# Altium PCB PCB.PcbDoc
Units mm, origin at the board's own origin, x right, y up, seen from the top; angles counter-clockwise.
Board outline 60.25 x 32.5 mm, 2 copper layers (Top Layer, Bottom Layer), stack 1.521 mm thick; 44 components, 23 nets, 113 pads, 63 vias.
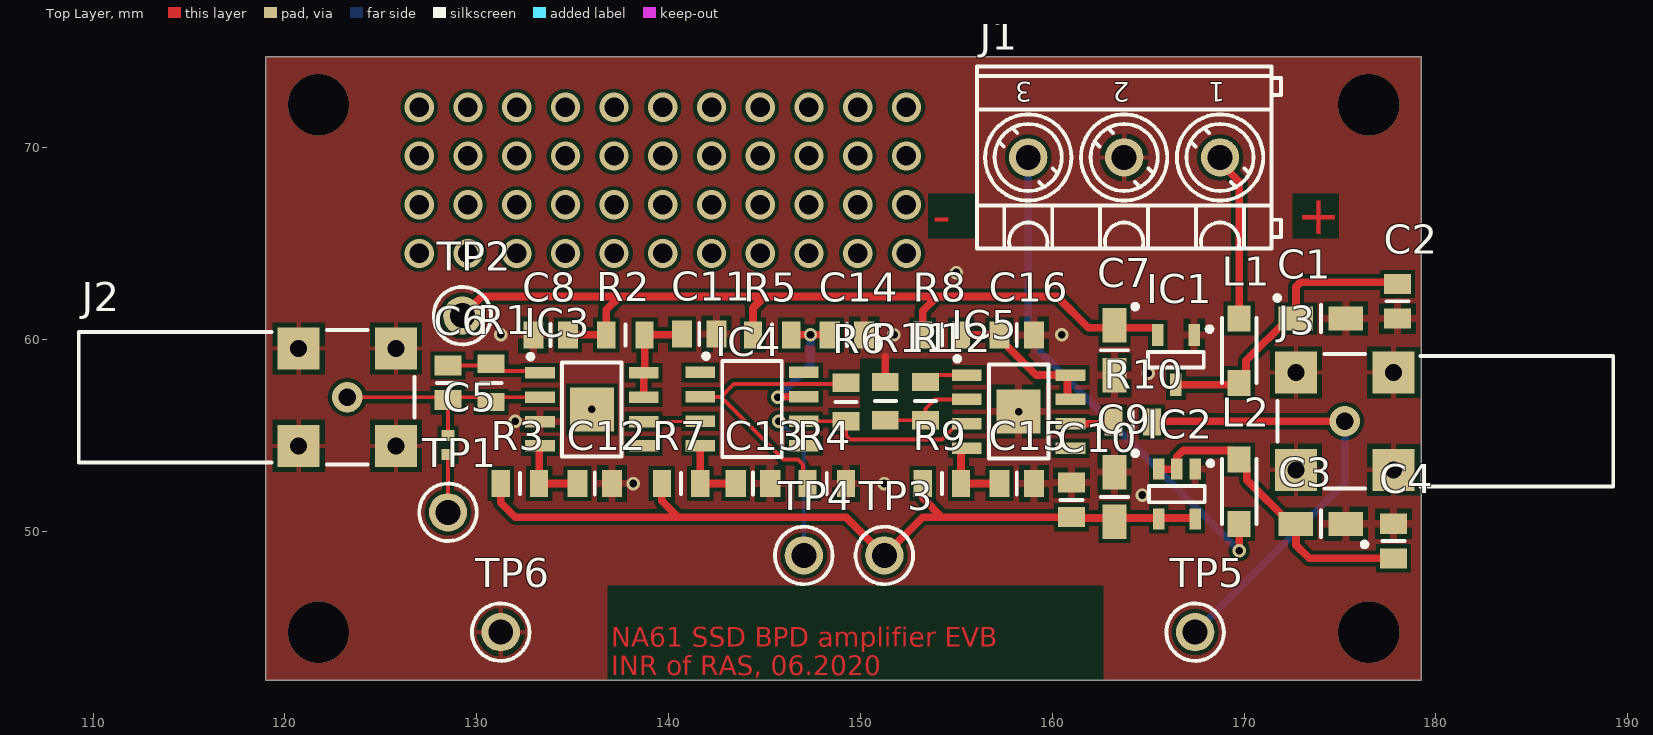
[diagram p0: Top Layer view]
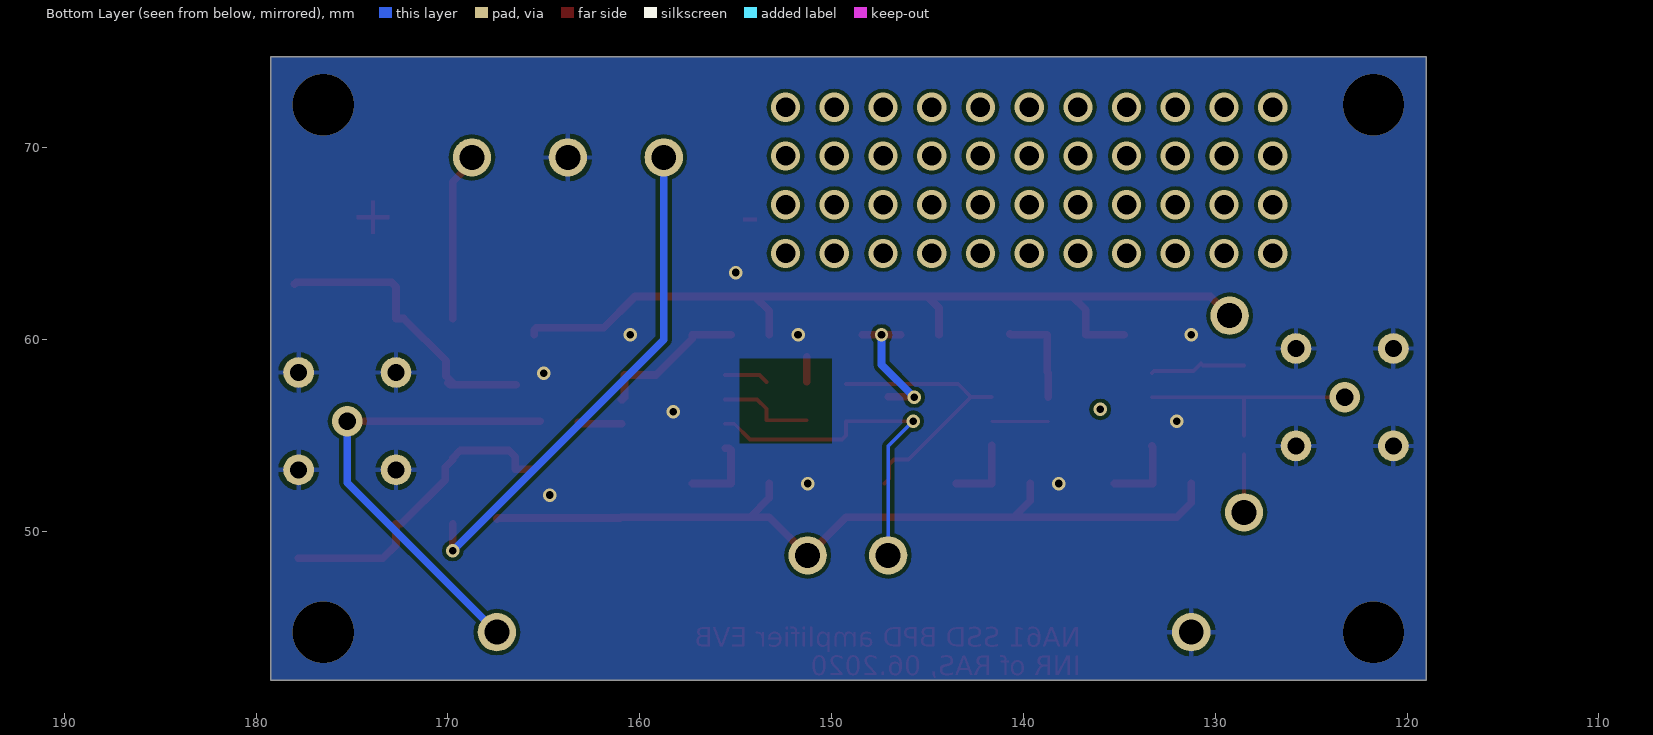
[diagram p1: Bottom Layer view, seen from below]
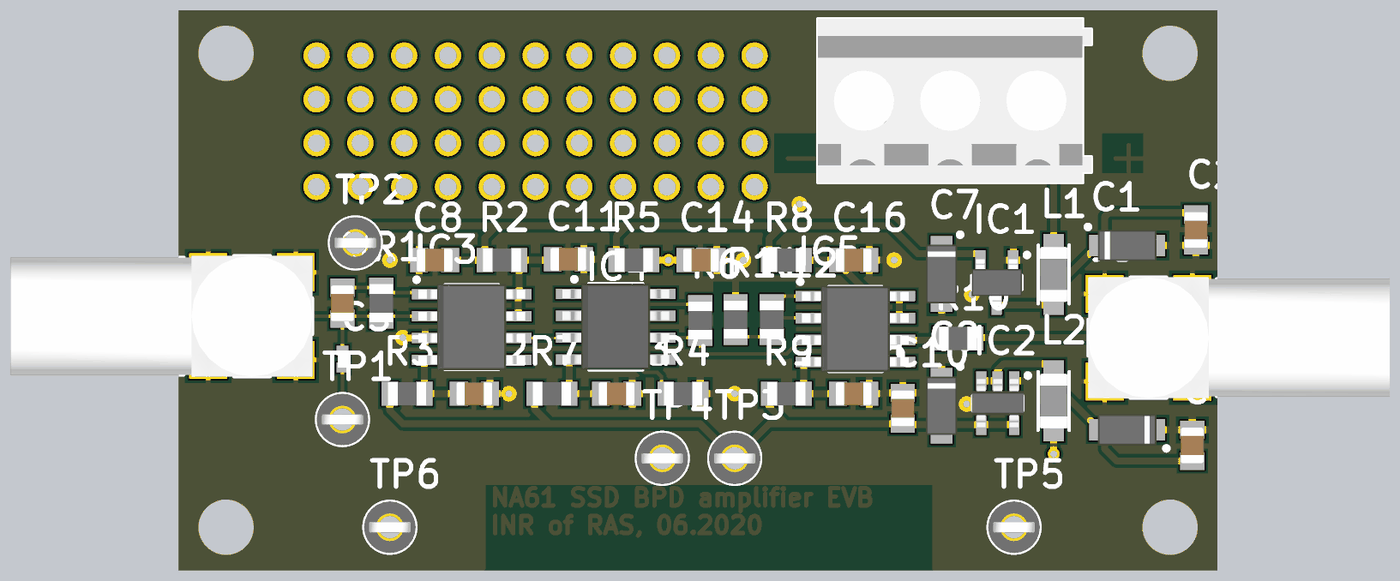
[diagram p2: 3D render of the assembled board from above, using the file's embedded part models]

## Layer stack, top to bottom
Top Solder: solder mask 0.0102, Solder Resist, Dk 3.5
Top Layer: signal copper 0.0356
Dielectric 1: dielectric 1.45, FR-4, Dk 4.8
Bottom Layer: signal copper 0.0356
Bottom Solder: solder mask 0.0102, Solder Resist, Dk 3.5

## Board outline
119,42.25 179.25,42.25 179.25,74.75 119,74.75

## Design rules (kind name [scope] priority, off if disabled: settings)
Clearance [All] p1: gap=0.2 ignorepadtopadclearanceinfootprint=FALSE
PolygonConnect [All] p1: thpad.connectstyle=Relief thpad.reliefconductorwidth=0.254 thpad.reliefentries=4 thpad.polygonreliefangle="90 Angle" thpad.airgapwidth=0.254 smdpad.connectstyle=Relief smdpad.reliefconductorwidth=0.4 smdpad.reliefentries=4 smdpad.polygonreliefangle="90 Angle" smdpad.airgapwidth=0.254 via.connectstyle=Direct via.reliefconductorwidth=0.254 via.reliefentries=4 via.polygonreliefangle="90 Angle" via.airgapwidth=0.254
RoomDefinition Amp [InComponentClass('Amp')] p1: confinementstyle=ConfineIn formatcopy=TRUE lockcomponents=FALSE outline 105.25,41.5 192.25,41.5 192.25,79 105.25,79
RoutingVias [All] p1: holewidth=0.4 width=0.7 viastyle="Through Hole" minholewidth=0.4 minwidth=0.7 maxholewidth=0.4 maxwidth=0.7
SolderMaskExpansion SolderMaskExpansion_Via [IsVia and not IsStitchingVia] p1: expansion=-1
SolderMaskExpansion [All] p2: expansion=0.102
Width [All] p1: maxlimit=0.4 minlimit=0.15 preferedwidth=0.2
30 further rules are at their usual default settings.

## Components (designator, comment, footprint, x,y, rotation, side; value= is the part's Value field where it differs from the comment)
C1 "22uF" CAPMP3216X180N 174.01,61.1 r0 top
C2 "100nF" CAPC2012X135N 178,62 r270 top
C3 "22uF" CAPMP3216X180N 174.01,50.4 r180 top
C4 "100nF" CAPC2012X135N 177.79,49.5 r90 top
C5 "0.5pF" CAPC1005X50N 128.5,54.51 r90 top
C6 "10pF" CAPC2012X135N 128.5,57.75 r90 top
C7 "1uF" CAPMP3216X180N 163.25,59.45 r270 top
C8 "100nF" CAPC2012X135N 133.85,60.25 r180 top
C9 "1uF" CAPMP3216X180N 163.25,51.8 r270 top
C10 "100nF" CAPC2012X135N 161,51.65 r90 top
C11 "100nF" CAPC2012X135N 141.6,60.3 r0 top
C12 "100nF" CAPC2012X135N 136.15,52.5 r0 top
C13 "100nF" CAPC2012X135N 144.4,52.5 r0 top
C14 "100nF" CAPC2012X135N 149.3,60.25 r0 top
C15 "100nF" CAPC2012X135N 158.15,52.5 r0 top
C16 "100nF" CAPC2012X135N 158.15,60.25 r0 top
IC1 "MCP1702T-5002E/CB" SOT95P255X145-3N 166.45,58.95 r270 top
IC2 "MAX1735EUK50+T" SOT95P280X145-5N 166.5,51.95 r270 top
IC3 "ADA4817-1 AD" SOIC127P600X175-9N-S229 136,56.365 r0 top
IC4 "AD8055ANZ ANALOG DEVICES" SOIC127P600X175-8N 144.35,56.385 r0 top
IC5 "AD8000YRDZ" SOIC127P600X175-9N-S229 158.25,56.25 r0 top
J1 "Terminal" WIELAND_25.161.0353.0 163.75,69.5 r180 top
J2 "LEMO 00" LEMO_EPK.00.250.NTN 123.25,57 r180 top
J3 "LEMO 00" LEMO_EPK.00.250.NTN 175.25,55.75 r0 top
L1 "50R@100MHz" IND_MURATA_BLM31PG 169.75,59.425 r270 top
L2 "50R@100MHz" IND_MURATA_BLM31PG 169.75,52.075 r90 top
R1 "5k1" RESC2012X60N 130.75,57.75 r90 top
R2 "3" RESC2012X60N 137.75,60.25 r0 top
R3 "3" RESC2012X60N 132.25,52.5 r0 top
R4 "5k1" RESC2012X60N 148.25,52.5 r180 top
R5 "3" RESC2012X60N 145.4,60.25 r0 top
R6 "43k" RESC2012X60N 149.25,56.75 r270 top
R7 "3" RESC2012X60N 140.65,52.5 r0 top
R8 "3" RESC2012X60N 154.25,60.25 r0 top
R9 "3" RESC2012X60N 154.25,52.5 r0 top
R10 "51" RESC2012X60N 164.2,55.7 r0 top
R11 "432" RESC2012X60N 151.3,56.8 r270 top
R12 "432" RESC2012X60N 153.4,56.8 r90 top
TP1 "Test Point" VERO_20-2136 128.5,51 r0 top
TP2 "Test Point" VERO_20-2136 129.25,61.25 r0 top
TP3 "Test Point" VERO_20-2136 151.25,48.75 r0 top
TP4 "Test Point" VERO_20-2136 147.05,48.75 r0 top
TP5 "Test Point" VERO_20-2136 167.45,44.75 r0 top
TP6 "Test Point" VERO_20-2136 131.25,44.75 r0 top

## Footprints (in the part's own frame and the unit in brackets; to place one, negate y for a bottom-side part, rotate by r counter-clockwise, add the part's x,y. Pads: shape width x height; smd on the part's side, far side on the other; paste and mask are expansions set on the pad)
CAPC1005X50N [mm] "Chip Capacitor, Body 1.0x0.55mm, IPC Medium Density"
  rect 0.57x0.68 smd: 1(-0.49,0) 2(0.49,0)
  body extent -0.5,-0.27 0.5,0.28, height 0.5
CAPC2012X135N [mm] "Chip Capacitor, Body 2.0x1.25mm, IPC Medium Density"
  rect 1.05x1.4 smd: 1(-0.9,0) 2(0.9,0)
  silkscreen extent 0,-0.58 0,0.58, body extent -1.05,-0.67 1.05,0.68, height 1.25
CAPMP3216X180N [mm] "Capacitor, Polarized, Molded  Body 3.2x1.6mm, IPC Medium Density"
  rect 1.8x1.25 smd: 1(-1.3,0) 2(1.3,0)
  silkscreen extent -2.4,-0.7 0,1.2, body extent -1.7,-0.9 1.7,0.9, height 1.6
IND_MURATA_BLM31PG [mm] "Chip Ferrite Bead, 3.20mm L X 1.60mm W, BLM31PG Series"
  rect 1.35x1.2 smd: 1(-1.675,0) 2(1.675,0)
  silkscreen extent -1.7,-0.9 1.7,0.9, body extent -1.6,-0.8 1.6,0.8, height 1.3
LEMO_EPK.00.250.NTN [mm] "50 Ohm size 00 Coaxial Elbow (90°) socket"
  round 1.6 hole 0.9: 1(0,0)
  rect 2.2x2.2 / inner round 1.6 / far side round 1.6 hole 0.9: 2(-2.54,2.54) 2(-2.54,-2.54) 2(2.54,2.54) 2(2.54,-2.54)
  silkscreen extent -3.5,-3.5 14,3.5, body extent -3.5,-3.5 14,3.5, height 7
RESC2012X60N [mm] "Chip Resistor, EIA 0805, Metric 2012, Body 2.0x1.2mm, IPC Medium Density"
  rect 0.95x1.4 smd: 1(-1,0) 2(1,0)
  silkscreen extent 0,-0.55 0,0.55, body extent -1.1,-0.67 1.1,0.68, height 0.6
SOIC127P600X175-8N [mm] "SOIC 8, Pitch 1.27mm - Body 4x5mm, IPC Medium Density"
  rect 1.55x0.6 smd: 1(-2.7,1.905) 2(-2.7,0.635) 3(-2.7,-0.635) 4(-2.7,-1.905) 5(2.7,-1.905) 6(2.7,-0.635) 7(2.7,0.635) 8(2.7,1.905)
  silkscreen extent -2.52,-2.5 1.55,2.88, body extent -3.1,-2.5 3.1,2.5, height 1.75
SOIC127P600X175-9N-S229 [mm] "SOIC 8, Pitch 1.27mm - Body 4x5mm, (w/thermal tab 2.29mm X 2.29mm), IPC Medium Density"
  rect 1.55x0.6 smd: 1(-2.7,1.905) 2(-2.7,0.635) 3(-2.7,-0.635) 4(-2.7,-1.905) 5(2.7,-1.905) 6(2.7,-0.635) 7(2.7,0.635) 8(2.7,1.905)
  rect 2.29x2.29 smd: 9(0,0)
  silkscreen extent -3.32,-2.45 1.55,2.87, body extent -3.1,-2.5 3.1,2.5, height 1.75
SOT95P255X145-3N [mm] "SOT, 0.95mm Pitch; 3 Pin, 1.50mm W X 2.90mm L X 1.45mm H Body, IPC Medium Density"
  rect 1.15x0.6 smd: 1(-1.3,0.95) 2(-1.3,-0.95) 3(1.3,0)
  silkscreen extent -1.72,-1.45 0.4,1.88, body extent -1.35,-1.45 1.35,1.45, height 1.45
SOT95P280X145-5N [mm] "SOT, 0.95mm pitch; 5 pin, 1.60mm W X 2.90mm L X 1.45mm H body, IPC Medium Density"
  rect 1.1x0.6 smd: 1(-1.3,0.95) 2(-1.3,0) 3(-1.3,-0.95) 4(1.3,-0.95) 5(1.3,0.95)
  silkscreen extent -1.72,-1.45 0.43,1.88, body extent -1.4,-1.5 1.4,1.5, height 1.45
VERO_20-2136 [mm] "Black Bead PCB Terminal Test Pin (1.32 mm hole)"
  round 2 hole 1.3: 1(0,0)
  silkscreen extent -1.5,-1.5 1.5,1.5, body extent -1.5,-1.5 1.5,1.5, height 5.4
WIELAND_25.161.0353.0 [mm] "Terminal Block, Pitch 5mm, 3 Positions, Screw Connection"
  round 2 hole 1.3: 1(-5,0) 2(0,0) 3(5,0)
  silkscreen extent -8.18,-4.75 7.68,4.75, body extent -8.17,-4.75 7.68,4.75, height 15

## Part data
C1 C3: library part CTE3216-18_22UF_10V_10%, "Polarised capacitor", Case=A, Manufacturer=GENERIC, Manufacturer1 ComponentHeight=1.8mm, Manufacturer1 Example=AVX, Manufacturer1 Part Number=TAJA226K010R, Tolerance=±10%, Voltage=10V, Author="CERN DEM JLC", Component Type=Standard, CreateDate=03.12.2007, HelpURL=\\cern.ch\dfs\Applications\Altium\Datasheets\CTE_AVX_TAJ.pdf, LatestRevisionDate=03.12.2007, Manufacturer Part Number=CTE3216-18_22UF_10V_10%, Mounted=Yes, Part Description="Solid Tantalum Chip Capacitor", Part Number=CTE3216-18_22UF_10V_10%, Pin Count=2, Sense=No, SMD=Yes, Socket=No, Status=Preferred
C2 C4 C8 C10 C11 C12 C13 C14 C15 C16: library part CC0805_100NF_50V_10%_X7R, "Non-polarised capacitor", Case=0805, Manufacturer=GENERIC, Manufacturer1 ComponentHeight=1mm, Manufacturer1 Example=TDK, Manufacturer1 Part Number=C2012X7R1H104K085AA, Tolerance=±10%, Voltage=50V, Author="CERN DEM JLC", Component Type=Standard, CreateDate=03.12.2007, HelpURL=\\cern.ch\dfs\Applications\Altium\Datasheets\CC0805_X7R_TDK_C.pdf, LatestRevisionDate=22.04.2015, Manufacturer Part Number=CC0805_100NF_50V_10%_X7R, Mounted=Yes, Part Description="SMD Multilayer Chip Ceramic Capacitor", Part Number=CC0805_100NF_50V_10%_X7R, Pin Count=2, Sense=No, SMD=Yes, Socket=No, Status=Preferred, TC=X7R
C5: library part CC0402_0.5PF_25V_0.05PF_AVX_04023J0R5ABSTR, "Non-polarised capacitor", Case=0402, Manufacturer=AVX, Manufacturer Part Number=04023J0R5ABSTR, Tolerance=±0.05pF, Voltage=25V, Author="CERN DEM JLC", ComponentHeight=0.5mm, Component Type=Standard, CreateDate=22.02.2017, HelpURL=\\cern.ch\dfs\Applications\Altium\Datasheets\CC0402_AVX_ACCU-P.pdf, LatestRevisionDate=22.02.2017, Mounted=Yes, Part Description="Thin-Film Chip Capacitors for RF Signal and Power Applications, Accu-P Series", Part Number=CC0402_0.5PF_25V_0.05PF_AVX_04023J0R5ABSTR, Pin Count=2, Sense=No, SMD=Yes, Socket=No, Status=None
C6: library part CC0805_10PF_50V_1%_NP0, "Non-polarised capacitor", Case=0805, Manufacturer=GENERIC, Manufacturer1 ComponentHeight=1.35mm, Manufacturer1 Example=PHYCOMP, Manufacturer1 Part Number=223886118109, Tolerance=±1%, Voltage=50V, Author="CERN DEM MR", Component Type=Standard, CreateDate=31.05.2016, HelpURL=\\cern.ch\dfs\Applications\Altium\Datasheets\CC0805_NP0_PHYCOMP.pdf, LatestRevisionDate=31.05.2016, Manufacturer Part Number=CC0805_10PF_50V_1%_NP0, Mounted=Yes, Part Description="SMD Multilayer Chip Ceramic Capacitor", Part Number=CC0805_10PF_50V_1%_NP0, Pin Count=2, Sense=No, SMD=Yes, Socket=No, Status=None, TC=C0G/NP0
C7 C9: library part CTE3216-18_1UF_16V_10%, "Polarised capacitor", Case=A, Manufacturer=GENERIC, Manufacturer1 ComponentHeight=1.8mm, Manufacturer1 Example=AVX, Manufacturer1 Part Number=TAJA105K016RNJ, Tolerance=±10%, Voltage=16V, Author="CERN DEM JLC", Component Type=Standard, CreateDate=03.09.2012, HelpURL=\\cern.ch\dfs\Applications\Altium\Datasheets\CTE_AVX_TAJ.pdf, LatestRevisionDate=03.09.2012, Manufacturer Part Number=CTE3216-18_1UF_16V_10%, Mounted=Yes, Part Description="Solid Tantalum Chip Capacitor", Part Number=CTE3216-18_1UF_16V_10%, Pin Count=2, Sense=No, SMD=Yes, Socket=No, Status=Preferred
IC1: "3-Terminal Regulator 1=GND 2=OUT 3=IN", Case=SOT23-3, Manufacturer="MICROCHIP TECHNOLOGY", Author="CERN DEM JLC", Bonding=No, ComponentHeight=1.45mm, Component Type=Standard, CreateDate=16.02.2017, Device=MCP1702T-5002E/CB, HelpURL=\\cern.ch\dfs\Applications\Altium\Datasheets\MCP1702T-5002E-CB.pdf, LatestRevisionDate=16.02.2017, Manufacturer Part Number=MCP1702T-5002E/CB, Mounted=Yes, PackageDescription="SOT, 0.95mm Pitch; 3 Pin, 1.50mm W X 2.90mm L X 1.45mm H Body, IPC Medium Density", Part Description="5V 250mA Low Quiescent Current LDO Positive Voltage Regulator", Part Number=MCP1702T-5002E/CB, Pin Count=3, PressFit=No, Sense=No, SMD=Yes, Socket=No
IC2: "200mA, Negative-Output, Low-Dropout Linear Regulator", Case=SOT23-5, Manufacturer=MAXIM, Author="CERN DEM JLC", Bonding=No, ComponentHeight=1.45mm, Component Type=Standard, CreateDate=17.02.2010, Device=MAX1735EUK50+T, HelpURL=\\cern.ch\dfs\Applications\Altium\Datasheets\MAX1735EUK50+T.pdf, LatestRevisionDate=17.02.2010, Manufacturer Part Number=MAX1735EUK50+T, Mounted=Yes, PackageDescription="SOT, 0.95mm pitch; 5 pin, 1.60mm W X 2.90mm L X 1.45mm H body, IPC Medium Density", Part Description="5V, 200mA, Negative-Output, Low-Dropout Linear Regulator", Part Number=MAX1735EUK50+T, Pin Count=5, PressFit=No, Sense=No, SMD=Yes, Socket=No
IC3: library part ADA4817-1, Manufacturer=AD, Name=ADA4817-1
IC4: library part AD8055ANZ, Case=DIP8-300, Manufacturer="ANALOG DEVICES", Author="CERN DEM JLC", Bonding=No, ComponentHeight=5.33mm, Component Type=Standard, CreateDate=14.03.2011, Device=AD8055ANZ, HelpURL=\\cern.ch\dfs\Applications\Altium\Datasheets\AD8055ANZ.pdf, LatestRevisionDate=14.03.2011, Manufacturer Part Number=AD8055ANZ, Mounted=Yes, PackageDescription="DIP 8 Leads, Row Spacing 7.62 mm; Pitch 2.54 mm", Part Description="Low Cost, 300 MHz Voltage Feedback Amplifier", Part Number=AD8055ANZ, Pin Count=7, PressFit=No, Sense=No, SMD=No, Socket=Yes
IC5: "1.5 GHz Ultrahigh Speed Operational Amplifier", Case=SOIC8, Manufacturer="ANALOG DEVICES", Author="CERN DEM JLC", Bonding=No, ComponentHeight=1.75mm, Component Type=Standard, CreateDate=14.05.2013, Device=AD8000YRDZ, HelpURL=\\cern.ch\dfs\Applications\Altium\Datasheets\AD8000YRDZ.pdf, LatestRevisionDate=14.05.2013, Manufacturer Part Number=AD8000YRDZ, Mounted=Yes, PackageDescription="SOIC 8, Pitch 1.27mm - Body 4x5mm, (w/thermal tab 2.29mm X 2.29mm), IPC Medium Density", Part Description="1.5 GHz Ultrahigh Speed Operational Amplifier", Part Number=AD8000YRDZ, Pin Count=9, PressFit=No, Sense=No, SMD=Yes, Socket=No
J1: library part WIELAND_25.161.0353.0, "Terminal Block, 3 Positions, Screw Connection", Manufacturer=WIELAND, Manufacturer Part Number=25.161.0353.0, Author="CERN DEM JLC", ComponentHeight=15mm, Component Type=Standard, CreateDate=02.06.2009, Family=Terminal, HelpURL=\\cern.ch\dfs\Applications\Altium\Datasheets\WIELAND_25.161.0353.0.pdf, LatestRevisionDate=02.06.2009, Mounted=Yes, Part Description="16A 250VAC 3 Way PCB Terminal Block, Pitch 5mm, Screw Connection, Wire Size Max: 2.5mm?", Part Number=WIELAND_25.161.0353.0, Pin Count=3, PressFit=No, Sense=No, SMD=No, Socket=No, Status=None
J2 J3: library part LEMO_EPK.00.250.NTN, Manufacturer=LEMO, Manufacturer Part Number=EPK.00.250.NTN, Author="CERN DEM JLC", ComponentHeight=7mm, Component Type=Standard, CreateDate=04.09.2012, Family="LEMO 00", HelpURL=\\cern.ch\dfs\Applications\Altium\Datasheets\LEMO_EPK.00.250.NTN.pdf, LatestRevisionDate=04.09.2012, Mounted=Yes, Part Description="Size 00, 50 Ohms Coaxial Elbow (90°) socket With Clearance Under The Body", Part Number=LEMO_EPK.00.250.NTN, Pin Count=2, PressFit=No, SCEM=09.46.11.180.6, Sense=No, SMD=No, Socket=No, Status=None
L1 L2: library part IND1206_MURATA_BLM31PG500SN1, "Inductor", Case=1206, Manufacturer=MURATA, Manufacturer Part Number=BLM31PG500SN1, Power=3.5A, Resistance=0.015R, Author="CERN DEM JLC", ComponentHeight=1.3mm, Component Type=Standard, CreateDate=05.12.2013, HelpURL=\\cern.ch\dfs\Applications\Altium\Datasheets\IND1206_MURATA_BLM31P.pdf, LatestRevisionDate=05.12.2013, Mounted=Yes, Part Description="SMD EMIFIL Chip Ferrite Bead", Part Number=IND1206_MURATA_BLM31PG500SN1, Pin Count=2, Sense=No, SMD=Yes, Socket=No, Status=None
R1 R4: library part R0805_5K1_1%_0.125W_100PPM, "Resistor - 1%", Case=0805, Manufacturer=GENERIC, Manufacturer1 ComponentHeight=0.6mm, Manufacturer1 Example="NIC COMPONENT", Manufacturer1 Part Number=NRC10F5101TRF, Power=0.125W, Tolerance=±1%, Author="CERN DEM JLC", Component Type=Standard, CreateDate=03.12.2007, HelpURL=\\cern.ch\dfs\Applications\Altium\Datasheets\R0805_NIC_NRC.pdf, LatestRevisionDate=13.03.2008, Manufacturer Part Number=R0805_5K1_1%_0.125W_100PPM, Mounted=Yes, Part Description="General Purpose Thick Film Chip Resistor", Part Number=R0805_5K1_1%_0.125W_100PPM, Pin Count=2, PressFit=No, Sense=No, SMD=Yes, Socket=No, Status=Preferred, TC=±100ppm/°C
R2 R3 R5 R7 R8 R9: library part R0805_3R_1%_0.125W_200PPM, "Resistor - 1%", Case=0805, Manufacturer=GENERIC, Manufacturer1 ComponentHeight=0.65mm, Manufacturer1 Example="YAGEO PHYCOMP", Manufacturer1 Part Number="232273463008L or RC0805FR-073RL", Power=0.125W, Tolerance=±1%, Author="CERN DEM JLC", Component Type=Standard, CreateDate=03.12.2007, HelpURL=\\cern.ch\dfs\Applications\Altium\Datasheets\R0805_Phycomp_RC0805.pdf, LatestRevisionDate=17.10.2012, Manufacturer Part Number=R0805_3R_1%_0.125W_200PPM, Mounted=Yes, Part Description="General Purpose Thick Film Chip Resistor", Part Number=R0805_3R_1%_0.125W_200PPM, Pin Count=2, PressFit=No, Sense=No, SMD=Yes, Socket=No, Status=Preferred, TC=±200ppm/°C
R6: library part R0805_43K_1%_0.125W_100PPM, "Resistor - 1%", Case=0805, Manufacturer=GENERIC, Manufacturer1 ComponentHeight=0.6mm, Manufacturer1 Example="NIC COMPONENT", Manufacturer1 Part Number=NRC10F4302TRF, Power=0.125W, Tolerance=±1%, Author="CERN DEM JLC", Component Type=Standard, CreateDate=03.12.2007, HelpURL=\\cern.ch\dfs\Applications\Altium\Datasheets\R0805_NIC_NRC.pdf, LatestRevisionDate=13.03.2008, Manufacturer Part Number=R0805_43K_1%_0.125W_100PPM, Mounted=Yes, Part Description="General Purpose Thick Film Chip Resistor", Part Number=R0805_43K_1%_0.125W_100PPM, Pin Count=2, PressFit=No, Sense=No, SMD=Yes, Socket=No, Status=Preferred, TC=±100ppm/°C
R10: library part R0805_51R_1%_0.125W_100PPM, "Resistor - 1%", Case=0805, Manufacturer=GENERIC, Manufacturer1 ComponentHeight=0.6mm, Manufacturer1 Example="NIC COMPONENT", Manufacturer1 Part Number=NRC10F51R0TRF, Power=0.125W, Tolerance=±1%, Author="CERN DEM JLC", Component Type=Standard, CreateDate=03.12.2007, HelpURL=\\cern.ch\dfs\Applications\Altium\Datasheets\R0805_NIC_NRC.pdf, LatestRevisionDate=13.03.2008, Manufacturer Part Number=R0805_51R_1%_0.125W_100PPM, Mounted=Yes, Part Description="General Purpose Thick Film Chip Resistor", Part Number=R0805_51R_1%_0.125W_100PPM, Pin Count=2, PressFit=No, Sense=No, SMD=Yes, Socket=No, Status=Preferred, TC=±100ppm/°C
R11 R12: library part R0805_432R_0.1%_0.1W_10PPM, "Resistor - 0.1%", Case=0805, Manufacturer=GENERIC, Manufacturer1 ComponentHeight=0.6mm, Manufacturer1 Example="TYCO HOLSWORTHY", Manufacturer1 Part Number=RN73C2A432RBTG, Power=0.1W, Tolerance=±0.1%, Author="CERN DEM JLC", Component Type=Standard, CreateDate=03.12.2007, HelpURL=\\cern.ch\dfs\Applications\Altium\Datasheets\R0805_Tyco_RN73.pdf, LatestRevisionDate=13.03.2008, Manufacturer Part Number=R0805_432R_0.1%_0.1W_10PPM, Mounted=Yes, Part Description="Thin Film Chip Resistor", Part Number=R0805_432R_0.1%_0.1W_10PPM, Pin Count=2, PressFit=No, Sense=No, SMD=Yes, Socket=No, Status="Not Recommended", TC=±10ppm
TP1 TP2 TP3 TP4 TP5 TP6: library part VERO_20-2136, Manufacturer="VERO TECHNOLOGIES", Manufacturer Part Number=20-2136, Author="CERN DEM JLC", ComponentHeight=5.3mm, Component Type=Standard, CreateDate=21.07.2008, Family="Test Point", HelpURL=\\cern.ch\dfs\Applications\Altium\Datasheets\VERO_20-2136.pdf, LatestRevisionDate=15.07.2013, Mounted=Yes, Part Description="Black Bead PCB Terminal Test Pin for 1.6mm PCB Thickness (1.32mm Hole)", Part Number=VERO_20-2136, Pin Count=1, PressFit=No, Sense=No, SMD=No, Socket=No, Status=None

## Via types
v1: diameter 1.524, hole 1.016, Top Layer to Bottom Layer, 44 vias
v2: diameter 0.7, hole 0.4, Top Layer to Bottom Layer, 15 vias
v3: diameter 3.2, hole 3.2, Top Layer to Bottom Layer, 4 vias

## Nets (pads, with @x,y where several pads share a name; then routed paths per layer and width w, separated by ;. In a path a pad name is that pad's centre, name@x,y a point inside that pad or via, vN(x,y) a via of type N, cw(c..) or ccw(c..) an arc to the next point about the centre after c; other vN are vias at no path point)
GND: C1.2 C2.2 C3.1 C4.2 C7.2 C8.2 C9.1 C10.2 C11.2 C12.2 C13.2 C14.2 C15.2 C16.2 IC1.1 IC2.1 IC3.3 IC5.9 J1.2 J2.2 J3.2 R4.1 R11.1 TP6.1 | length 1.3
  Top Layer w0.4: R11.1 151.3,59.1
  other v2: 164.7,51.9 138.15,52.5 151.25,52.5 132,55.75 158.25,56.25 165,58.25 131.25,60.25 151.75,60.25 160.5,60.25 155,63.5
  other v3: 121.75,44.75 176.5,44.75 121.75,72.25 176.5,72.25
NetC1_1: C1.1 C2.1 IC1.3 L1.2 | length 15.5
  Top Layer w0.4: IC1.3 169.9,57.65 L1.2@170,57.75 ; L1.2 170.1,58.1 170.1,58.9 172.3,61.1 C1.1 172.71,62.766 172.944,63 177.9,63 C2.1
NetC3_2: C3.2 C4.1 IC2.2 IC2.3 L2.2 | length 16.4
  Top Layer w0.4: IC2.3 IC2.2 166.5,53.9 166.825,54.225 169.35,54.225 169.75,53.825 L2.2 170.15,53.35 170.15,52.685 172.435,50.4 C3.2 172.71,49.29 173.4,48.6 C4.1
NetC5_1: C5.1 TP1.1 | length 3
  Top Layer w0.2: TP1.1 C5.1
NetC5_2: C5.2 C6.1 IC3.2 J2.1 R1.1 | length 11.9
  Top Layer w0.2: J2.1 IC3.2 ; C5.2 C6.1
NetC6_2: C6.2 IC3.1 R1.2 | length 5
  Top Layer w0.2: C6.2 130.65,58.65 R1.2 131.125,58.375 133.195,58.375 IC3.1
NetC7_1: C7.1 C8.1 IC1.2 R2.1 R5.1 R8.1 TP2.1 | length 46.5
  Top Layer w0.4: TP2.1 130.25,62.25 137.45,62.25 ; C8.1 R2.1 136.75,61.55 137.45,62.25 ; R5.1 144.4,61.65 145,62.25 ; R8.1 153.25,61.5 154,62.25 ; IC1.2 165.5,60.525 165.4,60.625 161.875,60.625 160.25,62.25 154,62.25 ; 137.45,62.25 145,62.25 ; 145,62.25 154,62.25
NetC9_2: C9.2 C10.1 IC2.4 IC2.5 R3.1 R7.1 R9.1 TP3.1 | length 42.6
  Top Layer w0.4: R3.1 131.25,51.5 132,50.75 140.5,50.75 ; R7.1 139.65,51.6 140.5,50.75 ; TP3.1@150.625,49.375 149.25,50.75 140.5,50.75 ; TP3.1 153.25,50.75 154.25,50.75 ; R9.1 153.25,51.75 154.25,50.75 ; IC2.5 167.4,50.7 163.25,50.7 161.05,50.7 C10.1 154.25,50.75
NetC11_1: C11.1 IC3.7 IC3.8 R2.2 | length 5.2
  Top Layer w0.4: IC3.7 IC3.8 138.75,58.32 R2.2 140.65,60.25 C11.1
NetC12_1: C12.1 IC3.4 R3.2 | length 4
  Top Layer w0.4: IC3.4 133.25,54.41 R3.2 C12.1
NetC13_1: C13.1 IC4.4 R7.2 | length 3.8
  Top Layer w0.4: IC4.4 R7.2 C13.1
NetC14_1: C14.1 IC4.7 R5.2 | length 7.3
  Top Layer w0.4: v2(145.7,57) 145.72,57.02 IC4.7 ; R5.2 v2(147.4,60.25) C14.1
  Bottom Layer w0.4: v2(145.7,57) 147.4,58.7 v2(147.4,60.25)
NetC15_1: C15.1 IC5.4 R9.2 | length 4.1
  Top Layer w0.4: IC5.4 155.35,54.345 155.25,54.245 R9.2 C15.1
NetC16_1: C16.1 IC5.7 IC5.8 R8.2 | length 7.9
  Top Layer w0.4: R8.2 C16.1 157.25,60.075 159.17,58.155 160.8,58.155 160.8,56.985 160.9,56.885 IC5.7
NetIC3_6: IC3.6 IC4.3 | length 3
  Top Layer w0.15: IC3.6 141.63,55.73 IC4.3
NetIC4_2: IC4.2 R4.2 R6.1 | length 14.7
  Top Layer w0.2: IC4.2 142.73,57.02 ; R4.2 147,52.75 147,53.5 146.75,53.75 146,53.75 142.73,57.02 ; R6.1@149.25,57.69 143.4,57.69 142.73,57.02
NetIC4_6: IC4.6 IC5.3 R6.2 TP4.1 | length 18.5
  Top Layer w0.2: v2(145.75,55.75) IC4.6 R6.2 149.25,55 149.45,54.8 154.26,54.8 155.075,55.615 IC5.3
  Bottom Layer w0.2: v2(145.75,55.75) 147.05,54.45 TP4.1
NetIC5_1: IC5.1 R12.2 | length 2.3
  Top Layer w0.2: R12.2 153.755,58.155 IC5.1
NetIC5_2: IC5.2 R11.2 R12.1 | length 5.1
  Top Layer w0.2: R11.2 R12.1 153.4,56.4 153.885,56.885 IC5.2
NetIC5_6: IC5.6 R10.1 | length 2.3
  Top Layer w0.4: IC5.6 163.115,55.615 R10.1
NetJ1_1: J1.1 L1.1 | length 8.8
  Top Layer w0.4: J1.1 168.75,69.237 169.75,68.237 169.75,63 L1.1
NetJ1_3: J1.3 L2.1 | length 26.5
  Top Layer w0.4: v2(169.75,49) L2.1
  Bottom Layer w0.4: J1.3 158.75,60 v2(169.75,49)
NetJ3_1: J3.1 R10.2 TP5.1 | length 24.3
  Top Layer w0.4: R10.2@165.2,55.75 J3.1
  Bottom Layer w0.4: TP5.1 175.25,52.55 J3.1
pads on no net: IC3.5 IC3.9 IC4.1 IC4.5 IC4.8 IC5.5
copper on no net:
  other v1: 127,64.5 129.54,64.5 132.08,64.5 134.62,64.5 137.16,64.5 139.7,64.5 142.24,64.5 144.78,64.5 147.32,64.5 149.86,64.5 152.4,64.5 127,67.04 129.54,67.04 132.08,67.04 134.62,67.04 137.16,67.04 139.7,67.04 142.24,67.04 144.78,67.04 147.32,67.04 149.86,67.04 152.4,67.04 127,69.58 129.54,69.58 132.08,69.58 134.62,69.58 137.16,69.58 139.7,69.58 142.24,69.58 144.78,69.58 147.32,69.58 149.86,69.58 152.4,69.58 127,72.12 129.54,72.12 132.08,72.12 134.62,72.12 137.16,72.12 139.7,72.12 142.24,72.12 144.78,72.12 147.32,72.12 149.86,72.12 152.4,72.12
  other v2: 136,56.365

## Polygon pours and split planes (outlines as drawn)
GND on Bottom Layer "Bottom Layer-GND" (solid, remove dead copper, pour order 0): 119,74.75 179.25,74.75 179.25,42.25 119,42.25
GND on Top Layer "Top Layer-GND" (solid, remove dead copper, pour order 2): 119,74.75 179.25,74.75 179.25,42.25 119,42.25

## Other copper
Top Layer:
  pour cut-out: 154.8,59 150,59 150,54.6 154.8,54.6
  pour cut-out: 154.575,58.655
  text "-" at 153.75,65.5 h2
  text "+" at 172.75,65.5 h2
  text "NA61 SSD BPD amplifier EVB / INR of RAS, 06.2020" at 137,42.5 h1
Bottom Layer:
  pour cut-out: 154.8,59 150,59 150,54.6 154.8,54.6

## Text inside footprints (layer, text, board x,y; h text height)
J1: Top Overlay "3" at 158.97,73.422 h1 r180; Top Overlay "2" at 164.031,73.422 h1 r180; Top Overlay "1" at 169.03,73.422 h1 r180; Mechanical 14 "3" at 158.97,73.422 h1 r180; Mechanical 14 "2" at 164.031,73.422 h1 r180; Mechanical 14 "1" at 169.03,73.422 h1 r180